# EAGLE board jumper_bed_S (EAGLE 9.6.2)
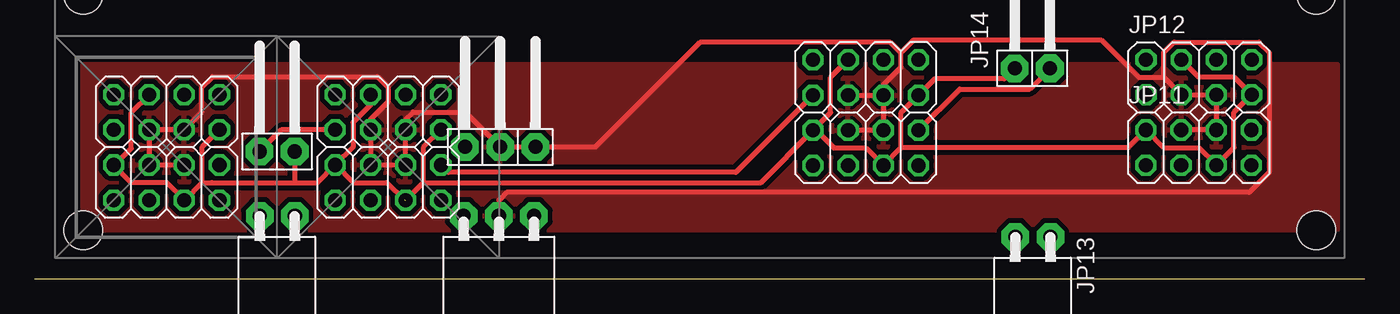
[diagram p0: board, top side]
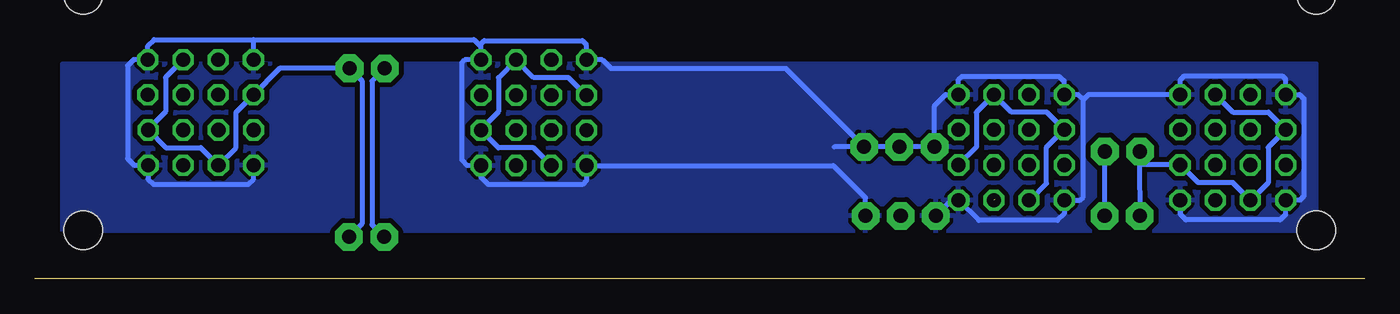
[diagram p1: board, bottom side, seen from below]

Size 96 x 0 mm. Coordinates in mm from the lower left corner, seen from the top.
Outline: 0,0 96,0
Copper layers (1*16): Top 0.035mm / dielectric 1.5mm / Bottom 0.035mm
Design rules "default *": minimum track width 14mil, minimum drill 0.35mm, track to track 14mil, track to pad 13mil, pad to pad 14mil, via to via 14mil, smd to smd 14mil, copper to edge 0mil, drill to drill 15mil, minimum pad ring 10mil, minimum via ring 8mil, stop-mask expansion 4mil, vias tented up to drill 0mil, thermal gap 10mil
Holes 2.8 mm at 92.5,3.5 92.5,20.5 3.5,20.5 3.5,3.5

## Footprints (pad centres in the part's own frame; a part is rotated, then mirrored left to right if it is on the bottom)
2X04 = drill 1.016 octagon: 1 -3.81,-1.27; 2 -3.81,1.27; 3 -1.27,-1.27; 4 -1.27,1.27; 5 1.27,-1.27; 6 1.27,1.27; 7 3.81,-1.27; 8 3.81,1.27
1X02/90 = drill 1.016 pad 1.981 octagon: 1 -1.27,-3.81 | drill 1.016 pad 2.007 octagon: 2 1.27,-3.81
1X03/90 = drill 1.016 pad 1.981 octagon: 1 -2.54,-3.81; 2 0,-3.81; 3 2.54,-3.81
1X03/90F = drill 1.016 pad 1.981 octagon: 1 -2.54,0; 2 0,0; 3 2.54,0
1X02/90F = drill 1.016 pad 1.981 octagon: 1 -1.31,0; 2 1.23,0

## Placement (x,y rotation side)
JP1  [2X04]  9.52,12.03 180 top  (outside the outline)
JP2  [2X04]  9.52,6.95 180 top  (outside the outline)
JP3  [2X04]  25.51,12.03 180 top  (outside the outline)
JP4  [2X04]  25.51,6.95 180 top  (outside the outline)
JP5  [2X04]  59.98,14.53 180 top  (outside the outline)
JP6  [2X04]  59.98,9.45 180 top  (outside the outline)
JP7  [1X02/90]  17.5,13 0 top  (outside the outline)
JP8  [1X03/90]  33.6,13.33 0 top  (outside the outline)
JP9  [1X03/90F]  33.5,4.54 180 top  (outside the outline)
JP10  [1X02/90F]  17.47,4.54 180 top  (outside the outline)
JP11  [2X04]  84.01,9.47 0 top  (outside the outline)
JP12  [2X04]  84.02,14.55 0 top  (outside the outline)
JP13  [1X02/90F]  72,3.02 180 top  (outside the outline)
JP14  [1X02/90]  72,19 0 top  (outside the outline)

## Library data of the parts
JP1-JP14 = pinhead2

## Nets
GND: JP1.1 JP1.7 JP2.2 JP2.8 JP3.1 JP3.7 JP4.2 JP4.8 JP5.1 JP5.7 JP6.2 JP6.8 JP8.1 JP8.3 JP9.1 JP9.3 JP11.1 JP11.7 JP12.2 JP12.8
SCL: JP1.2 JP1.5 JP2.4 JP2.7 JP3.2 JP3.5 JP4.4 JP4.7 JP5.2 JP5.5 JP6.4 JP6.7 JP7.2 JP10.1 JP11.2 JP11.5 JP12.4 JP12.7 JP13.2 JP14.1
SDA: JP1.3 JP1.8 JP2.1 JP2.6 JP3.3 JP3.8 JP4.1 JP4.6 JP5.3 JP5.8 JP6.1 JP6.6 JP7.1 JP10.2 JP11.3 JP11.8 JP12.1 JP12.6 JP13.1 JP14.2
VCC: JP1.4 JP1.6 JP2.3 JP2.5 JP3.4 JP3.6 JP4.3 JP4.5 JP5.4 JP5.6 JP6.3 JP6.5 JP8.2 JP9.2 JP11.4 JP11.6 JP12.3 JP12.5

## Tracks (layer width: path | path; a pad name or v marks a point on that pad's centre or on a via)
GND
  Bottom 0.356: JP5.7 56.17,16.89 56.48,17.19 63.56,17.19 63.89,16.86 | JP5.7 56.17,16.38 | JP3.7 21.7,14.24 22.08,14.62 29.09,14.62 29.32,14.39 JP3.1 30.26,13.3 31.06,12.49 JP8.1 38.29,9.52 | 20.33,12.91 20.33,5.91 20.56,5.68 JP4.8 21.7,4.71 22.18,4.23 27.87,4.23 JP4.2 29.82,5.68 JP9.3 | 13.35,4.76 13.33,4.8 JP2.2 13.33,4.67 12.91,4.25 6.11,4.25 5.71,4.65 JP2.8 4.7,5.68 4.41,5.97 4.41,13 4.7,13.3 JP1.7 5.71,14.41 5.92,14.62 13.07,14.62 13.33,14.35 JP1.1 19.95,13.3 20.33,12.91 | JP6.8 56.17,7.11 56.48,6.8 63.26,6.8 63.79,7.34 JP6.2 64.76,8.18 65.16,8.58 65.16,15.59 64.96,15.8 JP5.1 63.79,16.76 63.89,16.86 | JP6.8 56.17,7.54 | JP3.7 21.7,14.31 | JP12.2 80.21,17.26 | JP11.1 80.2,7.2 80.59,6.81 87.43,6.81 87.82,7.2 JP11.7 88.82,8.2 89.3,8.68 89.3,15.38 88.86,15.81 JP12.8 87.83,16.81 87.38,17.26 80.21,17.26 | JP5.7 55.03,15.8 54.42,15.19 41.81,15.19 JP8.3 | JP9.1 36.04,5.85 38.37,8.18 JP6.8 | 80.21,17.26 64.29,17.26 63.89,16.86 | 20.33,12.91 20.71,13.3 JP3.7
  pour Bottom: 94,3.5 3.5,3.5 3.5,15.5 94,15.5
SCL  (1 unrouted)
  Top 0.356: 26.7,5.71 26.65,5.73 25.43,6.95 22.99,6.95 21.72,8.22 JP4.7 | 21.65,8.22 JP4.7 | JP4.7 21.7,8.16 | JP6.7 57.44,11.99 57.44,14.54 JP5.5 | 62.52,9.45 JP6.4 59.98,9.45 57.69,9.45 56.41,10.72 JP6.7 | 63.79,13.24 JP5.2 | 62.52,9.45 62.52,11.97 63.79,13.24 | JP12.4 84.02,14.54 86.58,14.54 87.36,13.76 87.36,13.74 JP12.7 86.55,12 86.55,9.47 JP11.5 85.28,8.22 84.03,9.47 81.47,9.47 JP11.2 78.9,9.45 62.52,9.45 | JP1.2 12.06,9.49 12.06,6.93 | 12.06,6.93 10.81,5.68 JP2.4 10.79,5.69 9.54,6.95 6.98,6.95 JP2.7 5.78,8.22 6.98,9.42 6.98,12.03 JP1.5 | JP3.2 28.05,9.49 28.05,6.95 | JP3.5 24.24,12.55 22.97,11.28 22.97,9.49 JP4.7 | 12.06,6.93 12.79,6.93 12.81,6.95 18.77,6.95 | JP4.7 20.43,6.95 18.77,6.95 | 28.05,6.95 JP4.4 | 28.05,6.95 52.4,6.95 JP6.7 | JP14.1 69.97,14.43 64.98,14.43 63.79,13.24 | JP7.2 18.77,6.95
  Bottom 0.356: JP10.1 18.78,9.04 18.85,9.11 JP7.2 | JP13.2 71.66,3.91 71.66,14.26 JP14.1
SDA
  Top 0.356: JP14.2 73.27,15.15 71.81,13.69 66.77,13.69 JP6.1 | JP3.8 17.8,10.76 JP7.1 | JP5.8 50.61,7.69 29.84,7.69 JP4.1
  Bottom 0.356: 8.28,5.68 JP2.6 | JP4.6 24.19,5.68 22.97,6.89 22.97,9.51 21.72,10.76 JP3.8 21.7,10.77 22.95,12.03 25.51,12.03 JP3.3 26.78,13.29 28.05,12.02 28.05,9.49 JP4.1 | JP5.8 56.2,13.26 57.47,14.53 59.98,14.53 JP5.3 62.52,14.53 62.52,12.07 63.79,10.8 JP6.1 62.52,9.45 59.98,9.45 JP6.6 | JP12.6 86.56,14.54 86.56,12.06 87.82,10.8 JP11.8 86.55,9.47 84.02,9.47 JP11.3 81.47,9.47 81.47,12.02 JP12.1 80.21,13.3 78.32,15.19 JP14.2 72.37,14.29 72.37,3.96 JP13.1 | JP1.3 9.52,12.03 6.97,12.03 5.71,10.77 JP1.8 6.98,9.49 6.98,6.93 8.24,5.68 JP2.6 | JP2.6 9.52,6.95 12.03,6.95 13.3,8.22 JP2.1 16.27,8.24 | JP7.1 16.28,9.2 16.28,8.24 16.27,8.24 | 16.27,8.24 JP10.2
VCC
  Top 0.356: JP2.5 JP1.6 JP1.4 12.06,12.03 12.06,13.82 12.84,14.6 24.73,14.6 25.51,13.82 25.51,12.77 24.24,11.5 JP3.6 JP4.5 JP4.3 JP3.4 26.78,11.5 27.3,12.03 31.1,12.03 JP8.2 40.49,9.52 48.03,17.07 61.78,17.07 62.52,16.32 | JP2.5 | JP2.5 JP2.3 | JP5.6 JP5.4 | JP5.4 JP6.3 JP6.5 | JP11.4 JP11.6 JP12.5 JP12.3 81.48,14.54 | 81.48,14.54 79.68,14.54 76.98,17.24 63.44,17.24 62.52,16.32 | JP5.4 61.25,14 62.52,15.27 62.52,16.32 | 81.48,14.54 81.48,16.34 82.22,17.09 88.35,17.09 89.1,16.34 89.1,7.68 87.65,6.23 34.05,6.23 33.5,5.68 JP9.2
  pour Top: 3.5,15.5 94,15.5 94,3.5 3.5,3.5

## Text on the board
bDocu: connector S.0